# Altium PCB main.PcbDoc
Units mil, origin at the board's own origin, x right, y up, seen from the top; angles counter-clockwise.
Board outline 5185 x 3010 mil, 4 copper layers (Top Layer, Middle 2, middle 3, Bottom Layer), stack 23.756 mil thick; 10 components, 100 nets, 260 pads, 0 vias.
Unrouted connection lines stored in the file: 10.
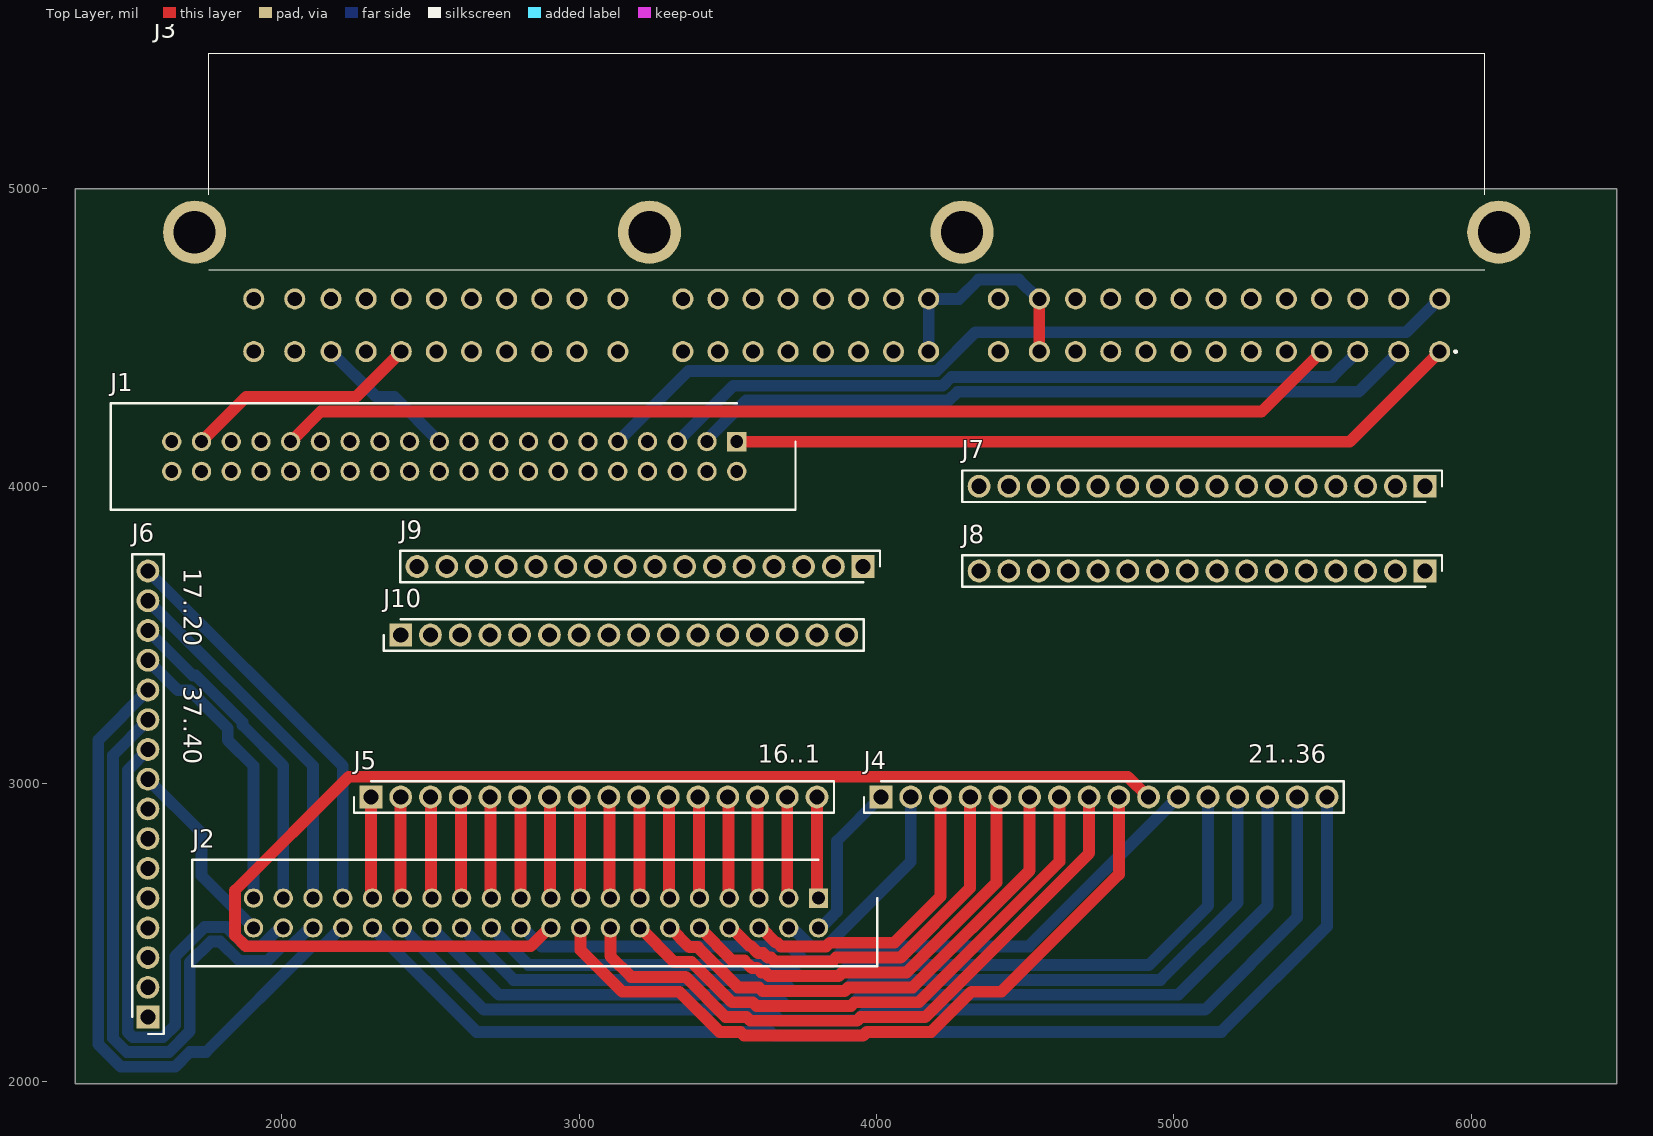
[diagram p0: Top Layer view]
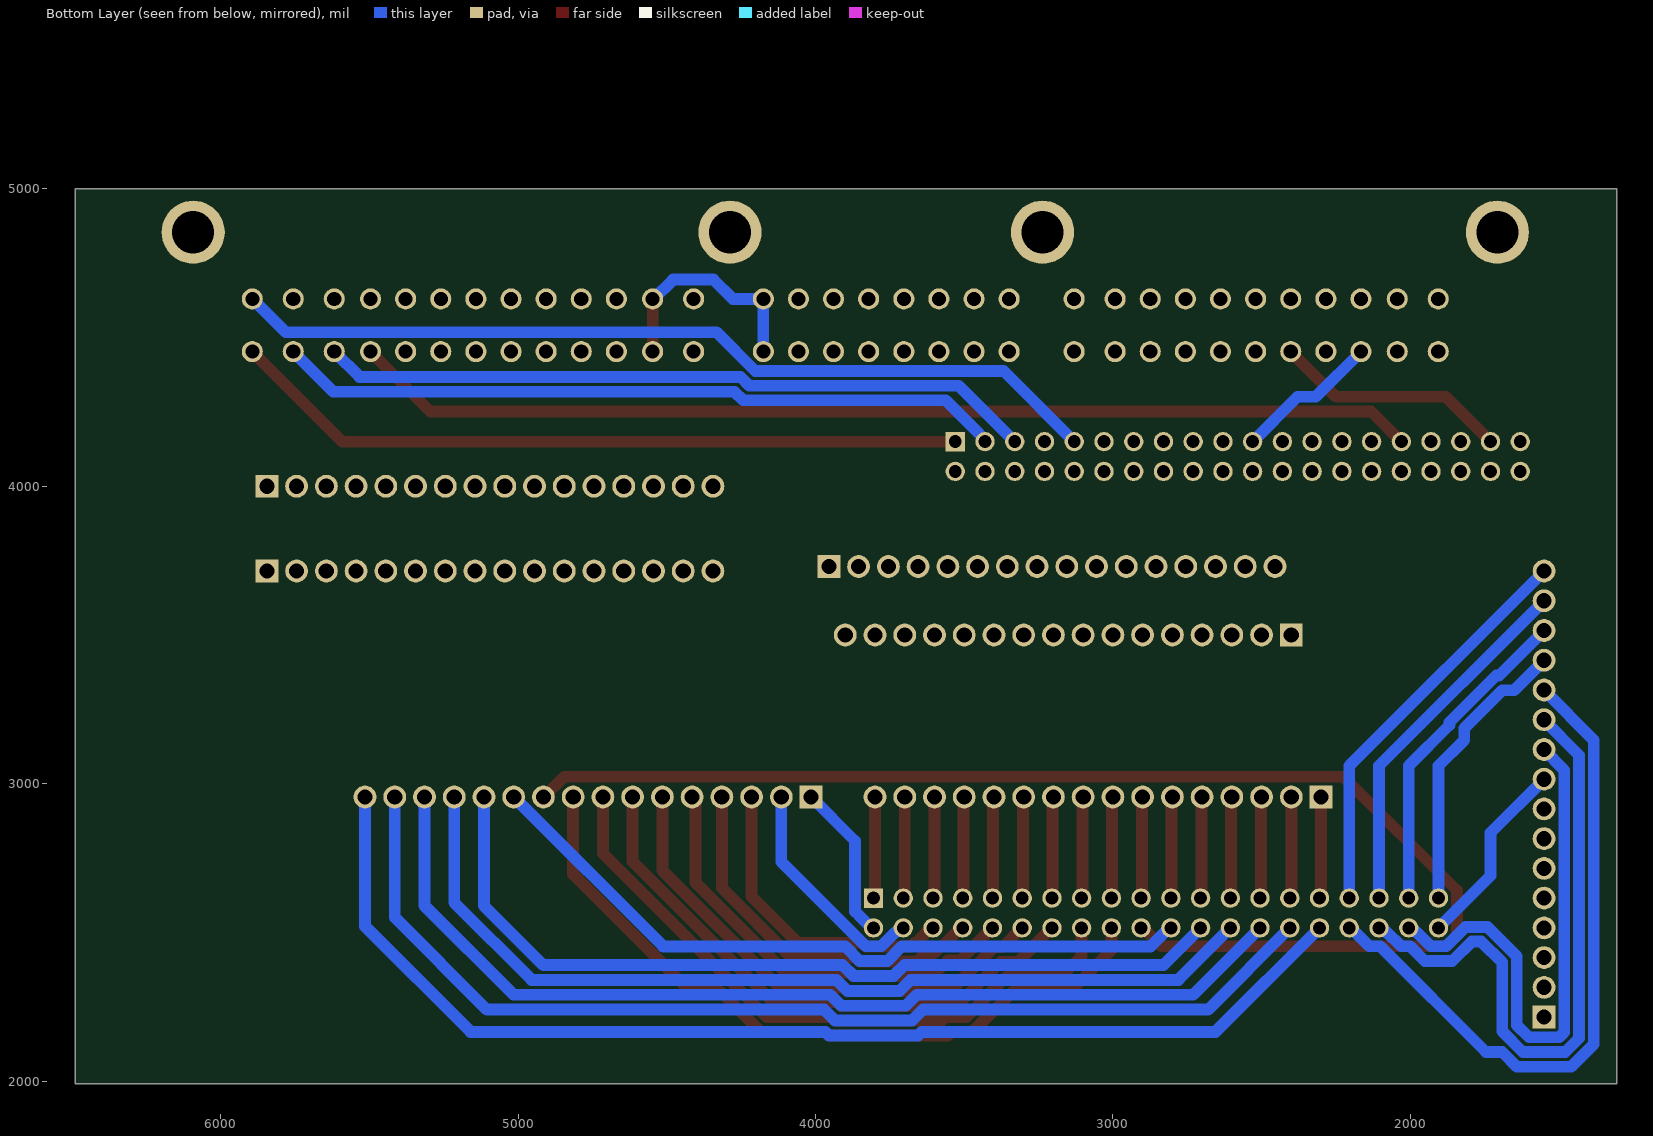
[diagram p1: Bottom Layer view, seen from below]
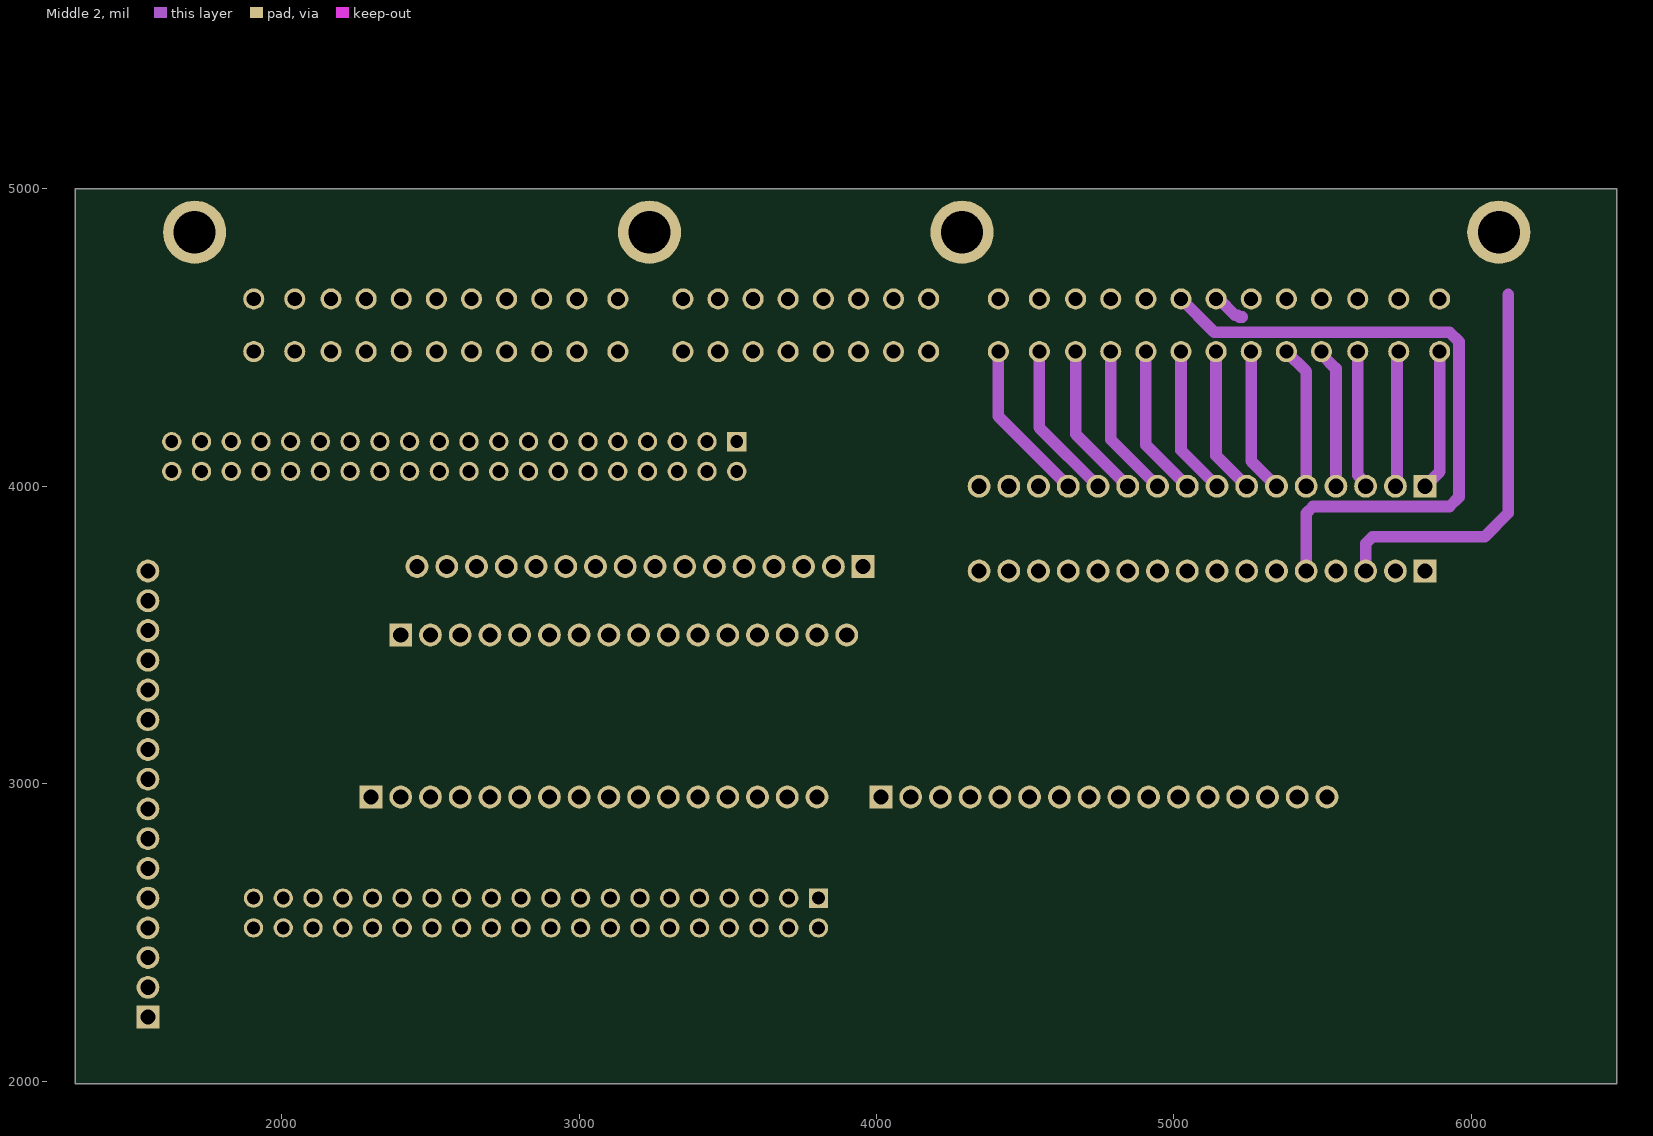
[diagram p2: Middle 2]
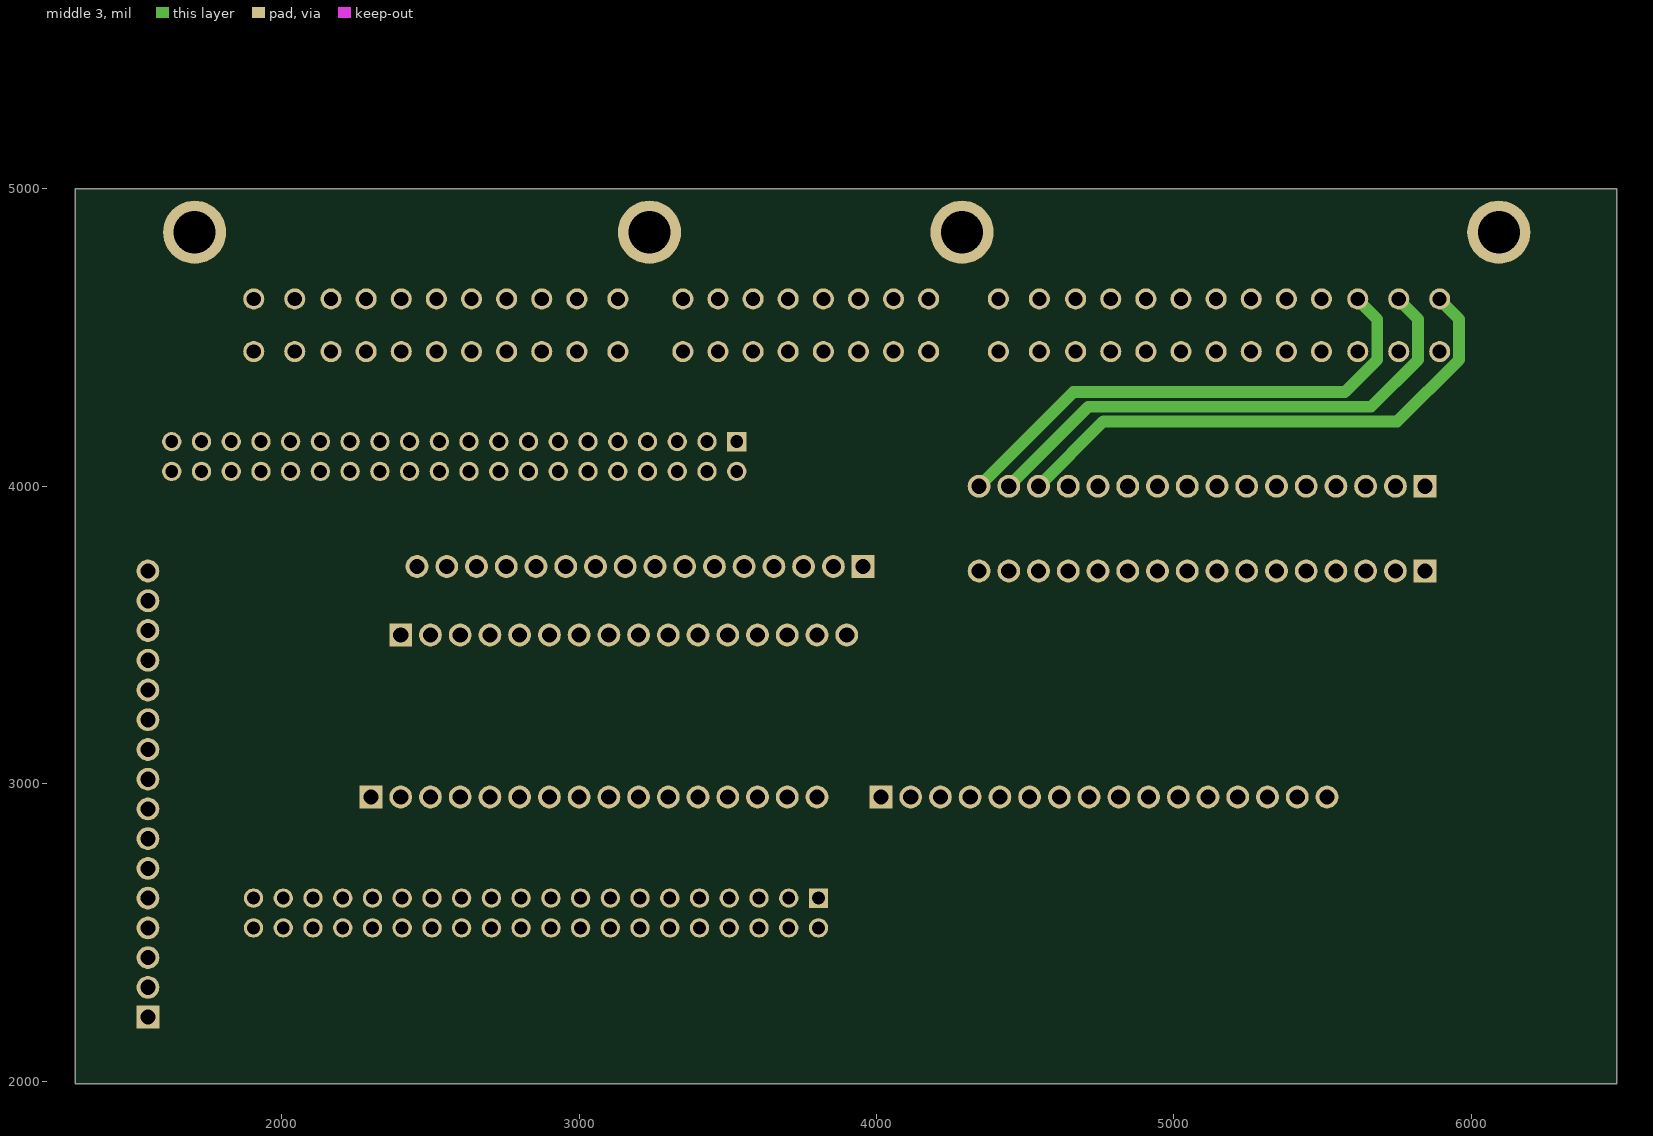
[diagram p3: middle 3]
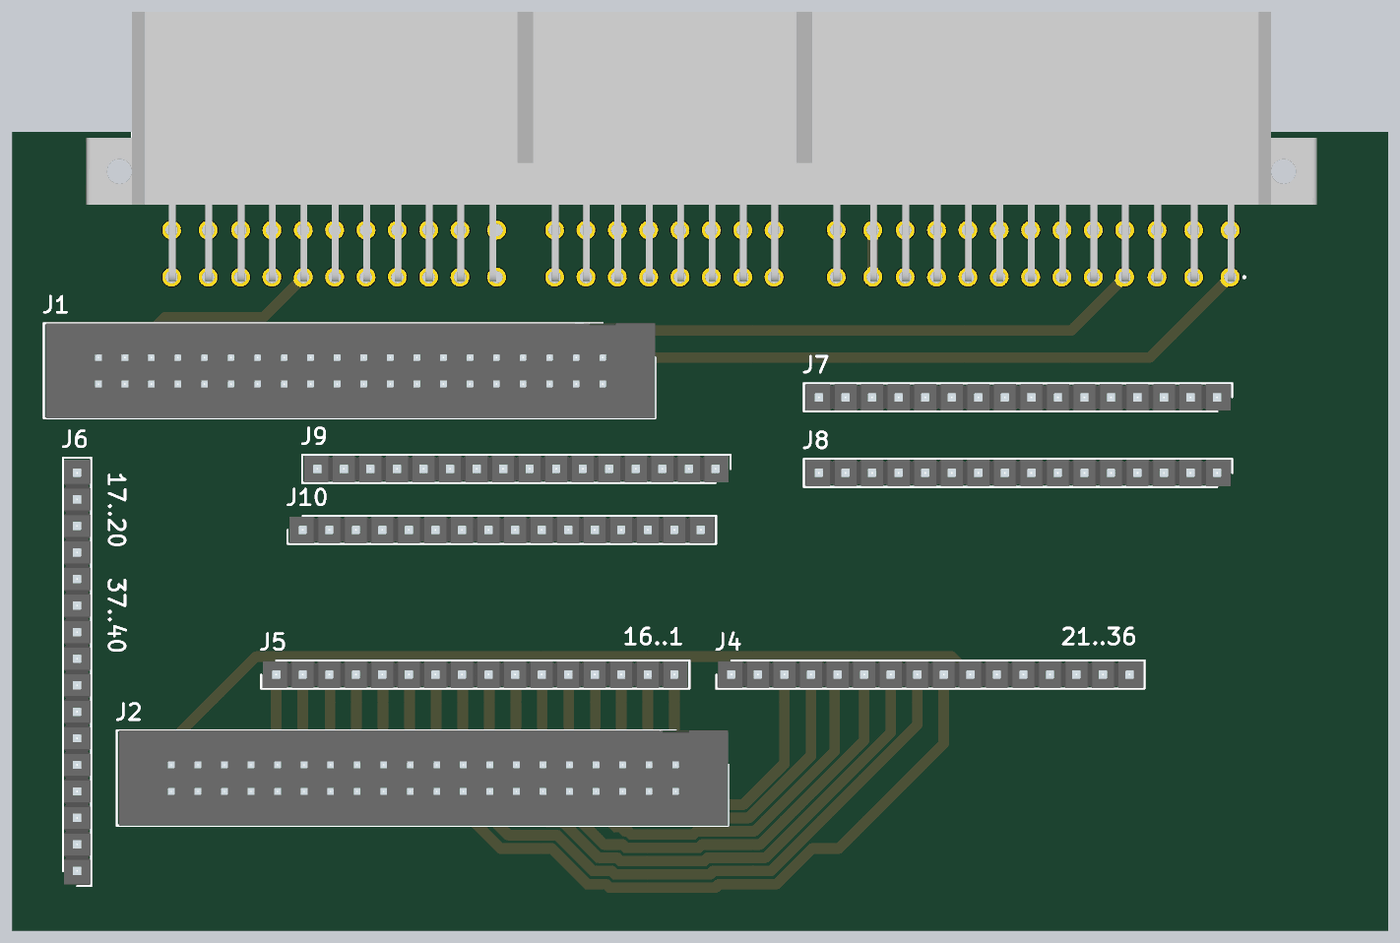
[diagram p4: 3D render of the assembled board from above, using the file's embedded part models]

## Layer stack, top to bottom
Top Solder: solder mask 0.4, Solder Resist, Dk 3.5
Top Layer: signal copper 1.4
Dielectric 2: prepreg 2.8, PP-006, Dk 4.1
Middle 2: signal copper 1.378
Dielectric 1: dielectric 12.6, FR-4, Dk 4.8
middle 3: signal copper 1.378
Dielectric 3: prepreg 2.8, PP-006, Dk 4.1
Bottom Layer: signal copper 1.4
Bottom Solder: solder mask 0.4, Solder Resist, Dk 3.5

## Board outline
1305,1990 6490,1990 6490,5000 1305,5000

## Design rules (kind name [scope] priority, off if disabled: settings)
AssemblyTestPointUsage [All] p1: isadvanced=TRUE
AssemblyTestpoint [All] p1: isadvanced=TRUE testpointundercomponent=TRUE minsize=40 maxsize=100 preferedsize=60 minholesize=0 maxholesize=40 preferedholesize=32 testpointgrid=1 usegrid=TRUE gridtolerance=0.01 allowsidetop=TRUE allowsidebottom=TRUE
Clearance Clearance_1 [(ExistsOnLayer('Middle 2') Or ExistsOnLayer('middle 3')) vs (ExistsOnLayer('Middle 2') Or ExistsOnLayer('middle 3'))] p1: gap=10 ignorepadtopadclearanceinfootprint=FALSE sourcerule=36 cellrowname=All cellrowtype=0 cellcolname=All cellcoltype=0 innerlayers=TRUE
Clearance Clearance_2 [(ExistsOnLayer('Top Layer') Or ExistsOnLayer('Bottom Layer')) vs (ExistsOnLayer('Top Layer') Or ExistsOnLayer('Bottom Layer'))] p2: gap=10 ignorepadtopadclearanceinfootprint=FALSE sourcerule=36 cellrowname=All cellrowtype=0 cellcolname=All cellcoltype=0 outerlayers=TRUE
Clearance [All] p3: gap=10 ignorepadtopadclearanceinfootprint=FALSE ismatrix=TRUE
ComponentClearance [All] p1: isadvanced=TRUE gap=10 collisioncheckmode=3 verticalgap=10 showdistances=FALSE
FabricationTestPointUsage [All] p1: isadvanced=TRUE valid=0 allowmultiple=FALSE
FabricationTestpoint [All] p1: isadvanced=TRUE side=3 testpointundercomponent=TRUE minsize=40 maxsize=100 preferedsize=60 minholesize=0 maxholesize=40 preferedholesize=32 testpointgrid=1 allowsidetop=TRUE allowsidebottom=TRUE usegrid=TRUE gridtolerance=0.01
FanoutControl Fanout_BGA [IsBGA] p1: isadvanced=TRUE bgadir=Out bgaviamode=Centered fanoutstyle=Auto fanoutdirection=Alternating viagrid=1 // Fanout_BGA (Default Rule)
FanoutControl Fanout_LCC [IsLCC] p2: isadvanced=TRUE bgadir=Out bgaviamode=Centered fanoutstyle=Auto fanoutdirection=Alternating viagrid=1 // Fanout_LCC (Default Rule)
FanoutControl Fanout_SOIC [IsSOIC] p3: isadvanced=TRUE bgadir=Out bgaviamode=Centered fanoutstyle=Auto fanoutdirection=Alternating viagrid=1 // Fanout_SOIC (Default Rule)
FanoutControl Fanout_Small [(CompPinCount < 5)] p4: isadvanced=TRUE bgadir=Out bgaviamode=Centered fanoutstyle=Auto fanoutdirection=OutThenIn viagrid=1 // Fanout_Small (Default Rule)
FanoutControl Fanout_Default [All] p5: isadvanced=TRUE bgadir=Out bgaviamode=Centered fanoutstyle=Auto fanoutdirection=Alternating viagrid=1 // Fanout_Default (Default Rule)
Height [All] p1: isadvanced=TRUE minheight=0 maxheight=1000 prefheight=500
HoleSize [All] p1: isadvanced=TRUE absolutevalues=TRUE maxlimit=100 minlimit=1 maxpercent=80.000 minpercent=20.000
HoleToHoleClearance [All] p1: isadvanced=TRUE gap=10 allowstackedmicrovias=TRUE
LayerPairs [All] p1: isadvanced=TRUE enforce=TRUE
MinimumSolderMaskSliver [All] p1: isadvanced=TRUE minsoldermaskwidth=10
NetAntennae [All] p1: isadvanced=TRUE netantennaetolerance=0
PasteMaskExpansion [All] p1: isadvanced=TRUE expansion=0
PlaneClearance [All] p1: isadvanced=TRUE clearance=20
PlaneConnect [All] p1: isadvanced=TRUE planeconnectstyle=Relief reliefexpansion=20 reliefentries=4 reliefconductorwidth=10 reliefairgap=10
PolygonConnect [All] p1: connectstyle=Relief reliefconductorwidth=10 reliefentries=4 polygonreliefangle="90 Angle" airgapwidth=10
RoutingCorners [All] p1: isadvanced=TRUE cornerstyle=45-Degree minsetback=100 maxsetback=100
RoutingPriority [All] p1: isadvanced=TRUE routingpriority=0
RoutingVias [All] p1: holewidth=28 width=50 viastyle="Through Hole" minholewidth=28 minwidth=50 maxholewidth=28 maxwidth=50
ShortCircuit [All] p1: isadvanced=TRUE allowed=FALSE
SilkToSilkClearance [All] p1: isadvanced=TRUE silktosilkclearance=10
SilkToSolderMaskClearance [IsPad] p1: isadvanced=TRUE minsilkscreentomaskgap=10 clearancetoexposedcopper=TRUE
SolderMaskExpansion [All] p1: isadvanced=TRUE expansion=4 istentingtop=FALSE
UnRoutedNet [All] p1: isadvanced=TRUE
UnpouredPolygon [All] p1: isadvanced=TRUE
Width [All] p1: maxlimit=196.85 minlimit=10 preferedwidth=39.37 minimp=50.000000 maximp=50.000000 favimp=50.000000
4 further rules are at their usual default settings.

## Components (designator, comment, footprint, x,y, rotation, side; value= is the part's Value field where it differs from the comment)
J1 "SBH11-PBPC-D20-ST-BK" SHDR40W64P254_2X20_5830X910X910P 3530,4150 r180 top
J2 "SBH11-PBPC-D20-ST-BK" SHDR40W64P254_2X20_5830X910X910P 3805,2615 r180 top
J3 "174518-7" 1745187 5894.06,4452.83 r90 top
J4 "61301611121" HDRV16W79P0X254_1X16_4064X254X874P 4015,2955 r0 top
J5 "61301611121" HDRV16W79P0X254_1X16_4064X254X874P 2300,2955 r0 top
J6 "61301611121" HDRV16W79P0X254_1X16_4064X254X874P 1550,2215 r90 top
J7 "61301611121" HDRV16W79P0X254_1X16_4064X254X874P 5845,4000 r180 top
J8 "61301611121" HDRV16W79P0X254_1X16_4064X254X874P 5845,3715 r180 top
J9 "61301611121" HDRV16W79P0X254_1X16_4064X254X874P 3955,3730 r180 top
J10 "61301611121" HDRV16W79P0X254_1X16_4064X254X874P 2400,3500 r0 top

## Footprints (in the part's own frame and the unit in brackets; to place one, negate y for a bottom-side part, rotate by r counter-clockwise, add the part's x,y. Pads: shape width x height; smd on the part's side, far side on the other; paste and mask are expansions set on the pad)
1745187 [mm]
  round 1.8 hole 1.2: 1(0,0) 2(0,3.5) 3(0,7) 4(4.5,0) 5(4.5,3.5) 6(4.5,7) 7(0,34.2) 8(0,37.7) 9(4.5,34.2) 10(4.5,37.7) 11(0,70.2) 12(4.5,70.2) 13(0,97.8) 14(0,101.3) 15(4.5,97.8) 16(4.5,101.3) 17(0,10.1) 18(0,13.1) 19(0,16.1) 20(0,19.1) 21(0,22.1) 22(0,25.1) 23(0,28.1) 24(0,31.1) 25(4.5,10.1) 26(4.5,13.1) 27(4.5,16.1) 28(4.5,19.1) 29(4.5,22.1) 30(4.5,25.1) 31(4.5,28.1) 32(4.5,31.1) 33(0,43.65) 34(0,46.65) 35(0,49.65) 36(0,52.65) 37(0,55.65) 38(0,58.65) 39(0,61.65) 40(0,64.65) 41(4.5,43.65) 42(4.5,46.65) 43(4.5,49.65) 44(4.5,52.65) 45(4.5,55.65) 46(4.5,58.65) 47(4.5,61.65) 48(4.5,64.65) 49(0,73.7) 50(0,76.7) 51(0,79.7) 52(0,82.7) 53(0,85.7) 54(0,88.7) 55(0,91.7) 56(0,94.7) 57(4.5,73.7) 58(4.5,76.7) 59(4.5,79.7) 60(4.5,82.7) 61(4.5,85.7) 62(4.5,88.7) 63(4.5,91.7) 64(4.5,94.7)
  round 5.4 hole 3.6: MH1(10.2,106.35) MH2(10.2,67.5) MH3(10.2,40.8) MH4(10.2,-5.05)
  silkscreen extent -0.1,-3.85 25.5,105.15, body extent -0.41,-8.31 25.41,109.49, height 22.58
HDRV16W79P0X254_1X16_4064X254X874P [mm]
  rect 1.95x1.95 hole 1.3: 1(0,0)
  round 1.95 hole 1.3: 2(2.54,0) 3(5.08,0) 4(7.62,0) 5(10.16,0) 6(12.7,0) 7(15.24,0) 8(17.78,0) 9(20.32,0) 10(22.86,0) 11(25.4,0) 12(27.94,0) 13(30.48,0) 14(33.02,0) 15(35.56,0) 16(38.1,0)
  silkscreen extent -1.45,-1.35 39.55,1.35, body extent -1.27,-1.27 39.37,1.27, height 8.74
SHDR40W64P254_2X20_5830X910X910P [mm]
  rect 1.65x1.65 hole 1.1: 1(0,0)
  round 1.65 hole 1.1: 2(0,2.54) 3(2.54,0) 4(2.54,2.54) 5(5.08,0) 6(5.08,2.54) 7(7.62,0) 8(7.62,2.54) 9(10.16,0) 10(10.16,2.54) 11(12.7,0) 12(12.7,2.54) 13(15.24,0) 14(15.24,2.54) 15(17.78,0) 16(17.78,2.54) 17(20.32,0) 18(20.32,2.54) 19(22.86,0) 20(22.86,2.54) 21(25.4,0) 22(25.4,2.54) 23(27.94,0) 24(27.94,2.54) 25(30.48,0) 26(30.48,2.54) 27(33.02,0) 28(33.02,2.54) 29(35.56,0) 30(35.56,2.54) 31(38.1,0) 32(38.1,2.54) 33(40.64,0) 34(40.64,2.54) 35(43.18,0) 36(43.18,2.54) 37(45.72,0) 38(45.72,2.54) 39(48.26,0) 40(48.26,2.54)
  silkscreen extent -5.02,-3.28 53.48,5.82, body extent -5.02,-3.28 53.28,5.82, height 9.1

## Part data
J1 J2: "Connector", Manufacturer_Name=Sullins, Datasheet Link=https://drawings-pdf.s3.amazonaws.com/11091.pdf, Height=9.1mm, Manufacturer_Part_Number=SBH11-PBPC-D20-ST-BK
J3: "Connector", Manufacturer_Name="TE Connectivity", Mouser Part Number=571-174518-7, Arrow Part Number=174518-7, Arrow Price/Stock=https://www.arrow.com/en/products/174518-7/te-connectivity, Datasheet Link=https://www.arrow.com/en/products/174518-7/te-connectivity, Height=21.9mm, Manufacturer_Part_Number=174518-7, Mouser Price/Stock=https://www.mouser.co.uk/ProductDetail/TE-Connectivity-AMP/174518-7?qs=13zqzmHBAMHCi5ru1NMUcA%3D%3D
J4 J5 J6 J7 J8 J9 J10: "Connector", Manufacturer_Name="Wurth Elektronik", Mouser Part Number=710-61301611121, Datasheet Link=https://www.we-online.com/catalog/datasheet/61301611121.pdf, Height=8.74mm, Manufacturer_Part_Number=61301611121, Mouser Price/Stock=https://www.mouser.co.uk/ProductDetail/Wurth-Elektronik/61301611121?qs=PhR8RmCirEYq%2F9PEO1%2F%252B%252Bg%3D%3D

## Nets (pads, with @x,y where several pads share a name; then routed paths per layer and width w, separated by ;. In a path a pad name is that pad's centre, name@x,y a point inside that pad or via, vN(x,y) a via of type N, cw(c..) or ccw(c..) an arc to the next point about the centre after c; other vN are vias at no path point)
A1: J1.1 J3.1 J7.1 | length 2962.6
  Top Layer w39.37: J1.1 5591.22,4150 J3.1
  Middle 2 w40: J7.1 5894.06,4049.06 J3.1
A2: J1.3 J3.2 J7.2 | length 2913.3
  Middle 2 w10: J7.2 J7.2@5750.63,4005.63 ; J3.2@5750.63,4447.2 J3.2
  Middle 2 w40: J7.2@5750.63,4005.63 J3.2@5750.63,4447.2
  Bottom Layer w39.37: J1.3 3430,4156.92 3462.74,4189.66 ; 3462.74,4189.68 3562.03,4288.98 4243.42,4288.98 4272.69,4318.24 5621.67,4318.24 J3.2
A3: J1.5 J3.3 J7.3 | length 2877.7
  Middle 2 w39.37: J3.3 5618.46,4036.66 5645,4010.12 J7.3
  Bottom Layer w39.37: J1.5 3518.35,4338.35 4222.97,4338.35 4252.24,4367.61 5533.24,4367.61 J3.3
A4: J1.31 J3.17 J7.4 | length 4064.8
  Top Layer w39.37: J1.31 2131.48,4251.48 5295.06,4251.48 J3.17
  Middle 2 w39.37: J3.17 5496.42,4444.31 5545,4395.73 J7.4
A5: J3.18 J7.5 | length 480.5
  Middle 2 w39.37: J3.18 5445,4386.14 J7.5
A6: J3.19 J7.6 | length 488
  Middle 2 w39.37: J3.19 5260.2,4084.8 J7.6
A7: J3.20 J7.7 | length 495.5
  Middle 2 w39.37: J3.20 5142.09,4102.91 J7.7
A8: J3.21 J7.8 | length 503
  Middle 2 w39.37: J3.21 5023.98,4121.02 J7.8
A9: J3.22 J7.9 | length 510.5
  Middle 2 w39.37: J3.22 4905.87,4139.13 J7.9
A10: J3.23 J7.10 | length 518
  Middle 2 w39.37: J3.23 4787.76,4157.24 J7.10
A11: J3.24 J3.32 J7.11 J8.8 | length 525.5
  Middle 2 w39.37: J3.24 4669.65,4175.35 J7.11
A12: J3.7 J3.9 J3.33 J3.41 J7.12 J8.9 | length 1314.9
  Top Layer w39.37: J3.7 J3.9
  Middle 2 w39.37: J3.7 4547.6,4197.4 J7.12
  Bottom Layer w39.37: J3.33 J3.41 4277.87,4630 4342.98,4695.12 4479.09,4695.12 4544.21,4630 J3.9
A13: J3.8 J7.13 | length 550.3
  Middle 2 w39.37: J3.8 4409.8,4235.2 J7.13
A14: J1.9 J3.4 J7.14 | length 4784.6
  middle 3 w39.37: J7.14 4763.11,4218.11 5751.42,4218.11 5959.17,4425.86 5959.17,4561.49 5894.06,4626.61 J3.4
  Bottom Layer w39.37: J1.9 3367.72,4387.72 4202.52,4387.72 4332.76,4517.95 5782.01,4517.95 J3.4
A15: J3.5 J7.15 | length 1783.9
  middle 3 w39.37: J7.15 4712.48,4267.48 5662.99,4267.48 5821.38,4425.86 5821.38,4561.49 5756.26,4626.61 J3.5
A16: J3.6 J7.16 | length 1746.1
  middle 3 w39.37: J7.16 4661.85,4316.85 5574.57,4316.85 5683.58,4425.86 5683.58,4561.49 5618.46,4626.61 J3.6
A17: J3.25 J8.1
A18: J3.26 J8.2
A19: J3.27 J8.3 | length 1350
  Middle 2 w39.37: J8.3 5645,3807.57 5668.06,3830.63 6045.63,3830.63 6125,3910 6125,4645
A20: J3.28 J8.4 | length 113
  Middle 2 w39.37: J3.28 5150.61,4630 5205.61,4575 5215,4575 5220.63,4569.37 5230,4569.37
A21: J3.29 J8.5 | length 2247.5
  Middle 2 w39.37: J3.29 5136.02,4517.95 5926.94,4517.95 5959.17,4485.72 5959.17,3964.16 5926.94,3931.93 5725.24,3931.93 5468.06,3931.93 5445,3908.87 J8.5
A22: J3.30 J8.6
A23: J3.31 J8.7
A26: J3.10 J8.10
B2: J3.34
B3: J3.35
B4: J3.36
B5: J3.37
B6: J3.38
B7: J3.39
B8: J3.40
B10: J3.42
B11: J3.43
B12: J3.44
B13: J3.45
B14: J3.46
B15: J3.47
B16: J3.48
"BREAK SW": J3.12
"COOLANT TEMP": J1.37 J3.54 | length 797.4
  Top Layer w39.37: J1.37 1880.85,4300.85 2249.95,4300.85 J3.54
D1: J3.11
D2: J3.49
D3: J3.50
D4: J3.51
D5: J3.52
D6: J3.53
D8: J3.55
D9: J1.21 J3.56 | length 489.7
  Bottom Layer w39.37: J3.56 2317.69,4300.85 2379.15,4300.85 J1.21
D10: J3.13
D11: J3.14
D13: J3.57
D14: J3.58
D15: J3.59
D16: J3.60
D17: J3.61
D18: J3.62
D19: J3.63
D20: J3.64
D21: J3.15
D22: J3.16
NetJ2_1: J2.1 J5.16 | length 342.1
  Top Layer w40: J5.16 3800,2620 J2.1
NetJ2_2: J2.2 J4.1 | length 531.1
  Bottom Layer w39.37: J2.2 3811.92,2515 3844.66,2547.74 ; 3844.68,2547.74 3867.17,2570.22 3867.17,2807.17 J4.1
NetJ2_3: J2.3 J5.15 | length 342.1
  Top Layer w40: J5.15 3700,2620 J2.3
NetJ2_4: J2.4 J4.2 | length 771.4
  Bottom Layer w39.37: J2.4 3711.92,2515 3724.72,2502.2 3729.88,2502.2 3779.25,2452.83 3830.75,2452.83 4115,2737.08 J4.2
NetJ2_5: J2.5 J5.14 | length 342.1
  Top Layer w40: J5.14 3600,2620 J2.5
NetJ2_6: J2.6 J4.3 | length 1040.3
  Top Layer w40: J2.6 3611.75,2515 3661.75,2465 3666.64,2465 3679.12,2452.52 3830.88,2452.52 3843.36,2465 4060,2465 4215,2620 J4.3
NetJ2_7: J2.7 J5.13 | length 342.1
  Top Layer w40: J5.13 3502.5,2952.5 3502.5,2617.5 J2.7
NetJ2_8: J2.8 J4.4 | length 1264.5
  Top Layer w40: J2.8 3511.75,2515 3571.75,2455 3576.64,2455 3601.64,2430 3619.29,2430 3634.29,2415 3645.93,2415 3658.41,2402.52 3851.59,2402.52 3864.07,2415 4080.71,2415 4315,2649.29 J4.4
NetJ2_9: J2.9 J5.12 | length 342.1
  Top Layer w40: J5.12 3402.5,2952.5 3402.5,2617.5 J2.9
NetJ2_10: J2.10 J4.5 | length 1488.8
  Top Layer w40: J2.10 3515,2405 3555.93,2405 3580.93,2380 3598.58,2380 3613.58,2365 3625.22,2365 3637.7,2352.52 3872.3,2352.52 3884.78,2365 4101.42,2365 4404.14,2667.72 4404.14,2944.14 J4.5
NetJ2_11: J2.11 J5.11 | length 342.1
  Top Layer w40: J5.11 3302.5,2952.5 3302.5,2617.5 J2.11
NetJ2_12: J2.12 J4.6 | length 1713
  Top Layer w40: J2.12 3305.79,2515 3370.79,2450 3399.29,2450 3534.29,2315 3604.51,2315 3616.99,2302.52 3893.01,2302.52 3905.49,2315 4122.13,2315 4515,2707.87 J4.6
NetJ2_13: J2.13 J5.10 | length 342.1
  Top Layer w40: J5.10 3202.5,2952.5 3202.5,2617.5 J2.13
NetJ2_14: J2.14 J4.7 | length 1937.3
  Top Layer w40: J2.14 3320,2400 3378.58,2400 3513.58,2265 3583.8,2265 3596.28,2252.52 3913.72,2252.52 3926.2,2265 4142.84,2265 4615,2737.16 J4.7
NetJ2_15: J2.15 J5.9 | length 342.1
  Top Layer w40: J5.9 3102.5,2952.5 3102.5,2617.5 J2.15
NetJ2_16: J2.16 J4.8 | length 2217.2
  Top Layer w40: J2.16 3105,2420 3175,2350 3357.87,2350 3492.87,2215 3563.09,2215 3575.57,2202.52 3934.43,2202.52 3946.91,2215 4163.55,2215 4715,2766.45 J4.8
NetJ2_17: J2.17 J5.8 | length 342.1
  Top Layer w40: J5.8 3002.5,2952.5 3002.5,2617.5 J2.17
NetJ2_18: J2.18 J4.9 | length 2488.8
  Top Layer w40: J2.18 3005,2440 3145,2300 3337.16,2300 3472.16,2165 3542.38,2165 3554.86,2152.52 3955.14,2152.52 3967.62,2165 4184.26,2165 4319.26,2300 4420,2300 4815,2695 J4.9
NetJ2_19: J2.19 J5.7 | length 342.1
  Top Layer w40: J5.7 2902.5,2952.5 2902.5,2617.5 J2.19
NetJ2_20: J2.20 J4.10 | length 4513.2
  Top Layer w39.37: J2.20 2899.88,2515 2837.71,2452.83 1879.25,2452.83 1842.84,2489.25 1842.84,2640.75 2225.16,3023.07 4845.27,3023.07 4913.34,2955 J4.10
NetJ2_21: J2.21 J5.6 | length 342.1
  Top Layer w40: J5.6 2802.5,2952.5 2802.5,2617.5 J2.21
NetJ2_22: J2.22 J4.11 | length 2484.9
  Bottom Layer w40: J2.22 2810.83,2515 2873.31,2452.52 3709.3,2452.52 3758.67,2403.15 3851.33,2403.15 3900.7,2452.52 4512.52,2452.52 J4.11
NetJ2_23: J2.23 J5.5 | length 342.1
  Top Layer w40: J5.5 2702.5,2952.5 2702.5,2617.5 J2.23
NetJ2_24: J2.24 J4.12 | length 2940.1
  Bottom Layer w40: J2.24 2830,2390 3701.11,2390 3737.96,2353.15 3872.04,2353.15 3908.89,2390 4915,2390 5115,2590 J4.12
NetJ2_25: J2.25 J5.4 | length 342.1
  Top Layer w40: J5.4 2602.5,2952.5 2602.5,2617.5 J2.25
NetJ2_26: J2.26 J4.13 | length 3175.7
  Bottom Layer w40: J2.26 2780,2340 3680.4,2340 3717.25,2303.15 3892.75,2303.15 3929.6,2340 4955,2340 5215,2600 J4.13
NetJ2_27: J2.27 J5.3 | length 342.1
  Top Layer w40: J5.3 2502.5,2952.5 2502.5,2617.5 J2.27
NetJ2_28: J2.28 J4.14 | length 3423
  Bottom Layer w40: J2.28 2730,2290 3659.69,2290 3696.54,2253.15 3913.46,2253.15 3950.31,2290 5015,2290 5315,2590 J4.14
NetJ2_29: J2.29 J5.2 | length 342.1
  Top Layer w40: J5.2 2400,2620 J2.29
NetJ2_30: J2.30 J4.15 | length 3687.8
  Bottom Layer w40: J2.30 2680,2240 3638.98,2240 3675.83,2203.15 3934.17,2203.15 3971.02,2240 5105,2240 5415,2550 J4.15
NetJ2_31: J2.31 J5.1 | length 342.1
  Top Layer w40: J5.1 2300,2620 J2.31
NetJ2_32: J2.32 J4.16 | length 3946.8
  Bottom Layer w40: J2.32 2655,2165 3643.27,2165 3655.12,2153.15 3954.88,2153.15 3966.73,2165 5160,2165 5515,2520 J4.16
NetJ2_33: J2.33 J6.16 | length 1371.3
  Bottom Layer w39.37: J6.16 2205,3060 J2.33
NetJ2_34: J2.34 J6.12 | length 2307
  Bottom Layer w39.37: J6.12 1550,3313.34 1383.19,3146.53 1383.19,2123.42 1458.42,2048.19 1641.58,2048.19 1690.95,2097.56 1745.29,2097.56 2100.57,2452.83 2137.71,2452.83 2199.88,2515 J2.34
NetJ2_35: J2.35 J6.15 | length 1229.9
  Bottom Layer w39.37: J6.15 2105,3060 J2.35
NetJ2_36: J2.36 J6.11 | length 2174.1
  Bottom Layer w39.37: J6.11 1550,3213.34 1432.56,3095.9 1432.56,2143.87 1478.87,2097.56 1621.13,2097.56 1690.99,2167.42 1690.99,2398.94 1760.85,2468.8 1793.46,2468.8 1858.8,2403.46 1951.2,2403.46 2000.57,2452.84 2030.75,2452.84 2080.12,2502.2 2085.28,2502.2 2098.08,2515 J2.36
NetJ2_37: J2.37 J6.14 | length 1094
  Bottom Layer w39.37: J6.14 1701.35,3363.65 1710.81,3363.65 1867.91,3206.55 1867.91,3197.09 2005,3060 J2.37
NetJ2_38: J2.38 J6.10 | length 1851.4
  Bottom Layer w39.37: J6.10 1550,3113.34 1481.93,3045.27 1481.93,2164.32 1499.32,2146.93 1600.68,2146.93 1641.62,2187.87 1641.62,2419.39 1740.4,2518.17 1813.91,2518.17 1879.25,2452.84 1930.75,2452.84 1980.12,2502.21 1985.28,2502.21 1998.08,2515 J2.38
NetJ2_39: J2.39 J6.13 | length 970.3
  Bottom Layer w39.37: J6.13 1650.72,3314.28 1690.36,3314.28 1818.54,3186.1 1818.54,3146.46 1905,3060 J2.39
NetJ2_40: J2.40 J6.9 | length 647
  Bottom Layer w39.37: J6.9 1730.23,2834.77 1730.23,2689.77 J2.40
pads on no net: J1.2 J1.4 J1.6 J1.7 J1.8 J1.10 J1.11 J1.12 J1.13 J1.14 J1.15 J1.16 J1.17 J1.18 J1.19 J1.20 J1.22 J1.23 J1.24 J1.25 J1.26 J1.27 J1.28 J1.29 J1.30 J1.32 J1.33 J1.34 J1.35 J1.36 J1.38 J1.39 J1.40 J3.MH1 J3.MH2 J3.MH3 J3.MH4 J6.1 J6.2 J6.3 J6.4 J6.5 J6.6 J6.7 J6.8 J8.11 J8.12 J8.13 J8.14 J8.15 J8.16 J9.1 J9.2 J9.3 J9.4 J9.5 J9.6 J9.7 J9.8 J9.9 J9.10 J9.11 J9.12 J9.13 J9.14 J9.15 J9.16 J10.1 J10.2 J10.3 J10.4 J10.5 J10.6 J10.7 J10.8 J10.9 J10.10 J10.11 J10.12 J10.13 J10.14 J10.15 J10.16

## Silkscreen, mask and mechanical layers (free items; w line width, h text height)
Top Overlay:
  text "17..20" at 1670,3725 h60 r270
  text "37..40" at 1669.65,3326.77 h60 r270
  text "16..1" at 3600,3070 h60
  text "21..36" at 5250,3070 h60